# EAGLE board dookie_2 (EAGLE 5.06)
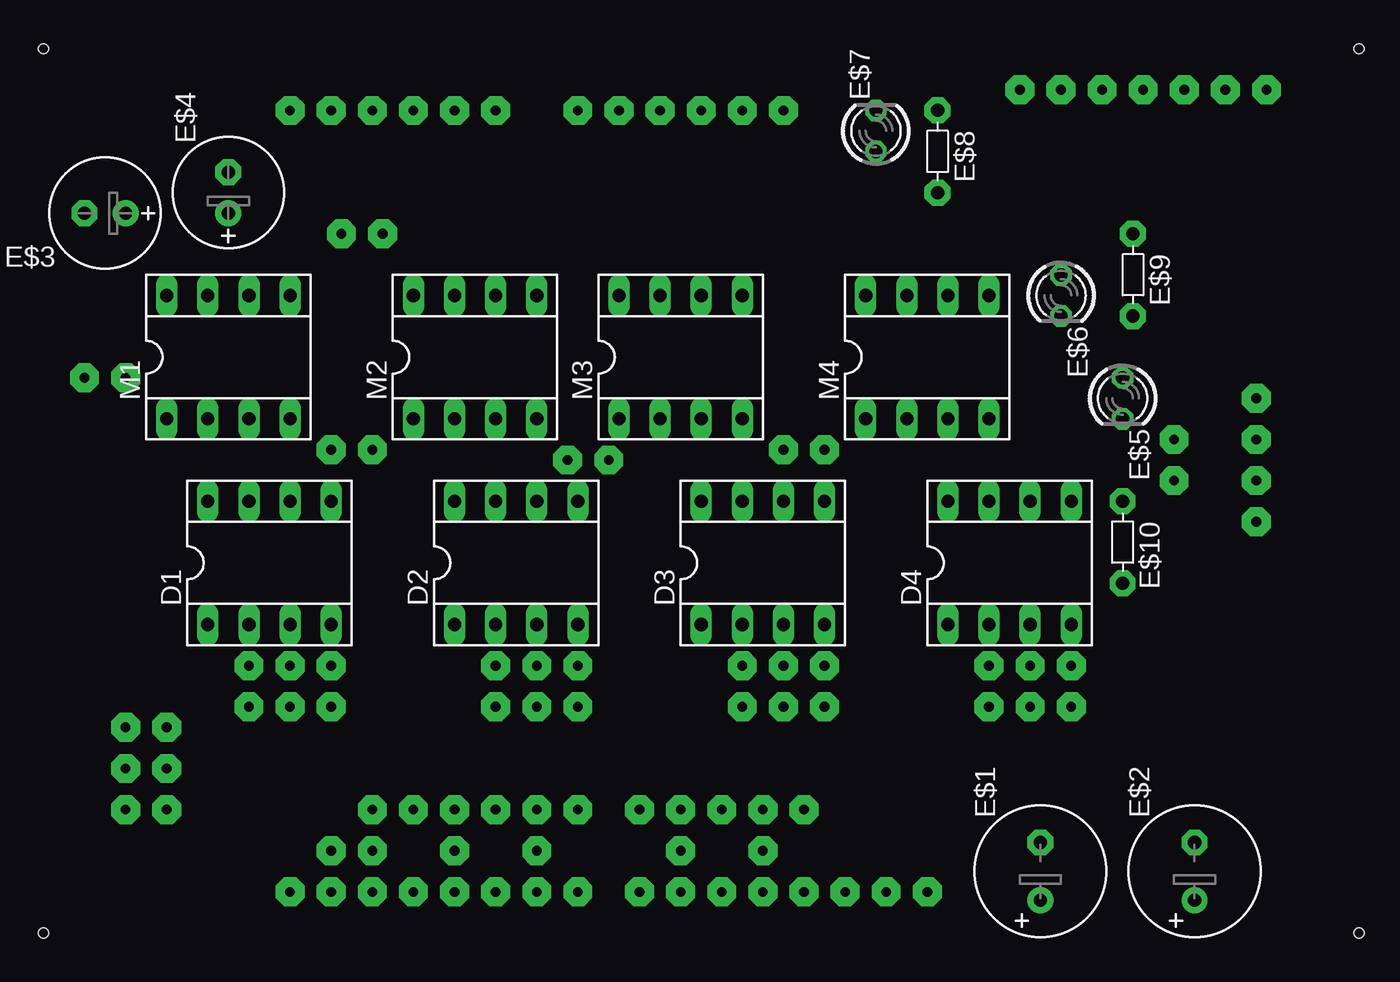
[diagram p0: board, top side]
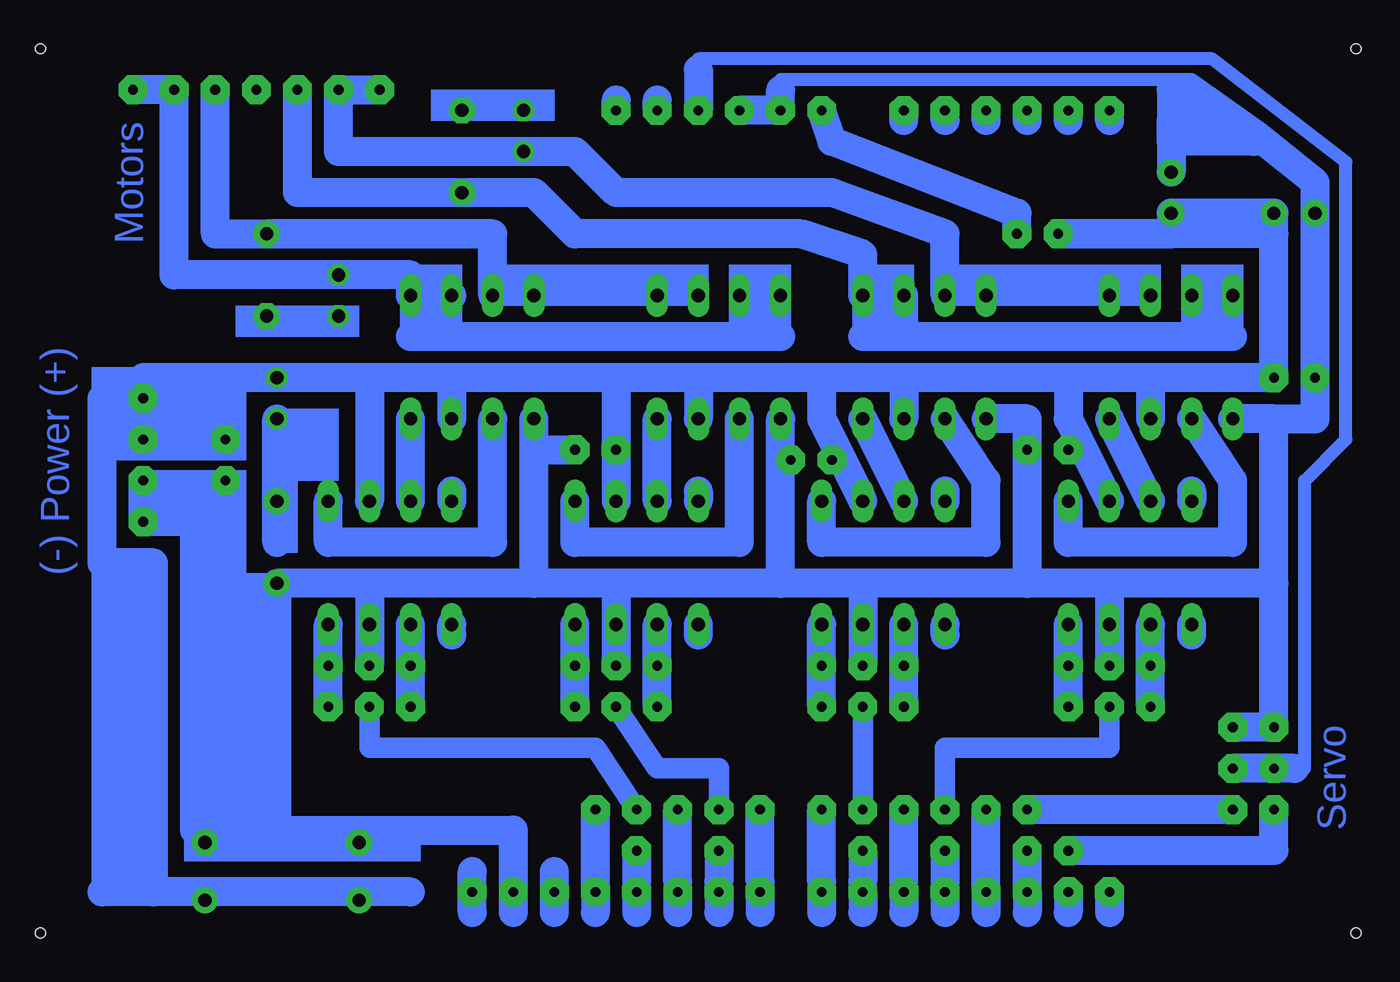
[diagram p1: board, bottom side, seen from below]

No outline drawn. Coordinates in mm, seen from the top.
Copper layers (1*16): Top 0.035mm / dielectric 1.5mm / Bottom 0.035mm
Design rules "default": minimum track width 10mil, minimum drill 24mil, track to track 8mil, track to pad 8mil, pad to pad 8mil, via to via 8mil, smd to smd 8mil, copper to edge 40mil, drill to drill 8mil, minimum pad ring 10mil, minimum via ring 8mil, stop-mask expansion 4mil, vias tented up to drill 0mil, thermal gap 10mil
Holes 0.6 mm at 0,0 0,54.61 81.28,54.61 81.28,0

## Footprints (pad centres in the part's own frame; a part is rotated, then mirrored left to right if it is on the bottom)
SOCKET-08 = drill 0.813 long: 1 -3.81,-3.81; 2 -1.27,-3.81; 3 1.27,-3.81; 4 3.81,-3.81; 5 3.81,3.81; 6 1.27,3.81; 7 -1.27,3.81; 8 -3.81,3.81
E3,5-8 = drill 0.813 pad 1.6 round: + -1.778,0 | drill 0.813 pad 1.6 octagon: - 1.778,0
E2,5-7 = drill 0.813 pad 1.6 round: + -1.27,0 | drill 0.813 pad 1.6 octagon: - 1.27,0
LED3MM = drill 0.813 octagon: A -1.27,0; K 1.27,0
R-5 = drill 0.813 pad 1.6 octagon: 1 -2.54,0; 2 2.54,0

## Placement (x,y rotation side)
D1  IXDF-404  [SOCKET-08]  13.97,22.86 0 top
D2  IXDF-404  [SOCKET-08]  29.21,22.86 0 top
D3  IXDF-404  [SOCKET-08]  44.45,22.86 0 top
D4  IXDF-404  [SOCKET-08]  59.69,22.86 0 top
E$1  [E3,5-8]  61.59,3.81 90 top
E$2  [E3,5-8]  71.12,3.81 90 top
E$3  [E2,5-7]  3.81,44.45 180 top
E$4  [E2,5-7]  11.43,45.72 90 top
E$5  [LED3MM]  66.67,33.02 270 top
E$6  [LED3MM]  62.87,39.37 270 top
E$7  [LED3MM]  51.44,49.53 90 top
E$8  [R-5]  55.24,48.26 270 top
E$9  [R-5]  67.31,40.64 270 top
E$10  [R-5]  66.67,24.13 270 top
M1  AOP-610  [SOCKET-08]  11.43,35.56 0 top
M2  AOP-610  [SOCKET-08]  26.67,35.56 0 top
M3  AOP-610  [SOCKET-08]  39.37,35.56 0 top
M4  AOP-610  [SOCKET-08]  54.61,35.56 0 top

## Library data of the parts
D1-D4 M1-M4 = ic-package
E$1-E$4 = rcl
E$5-E$7 = led
E$8-E$10 = discrete

## Nets
GND: E$4.-
VCC: E$3.+ E$4.+

## Tracks (layer width: path | path; a pad name or v marks a point on that pad's centre or on a via)
5V  (via drill 0.6 pad 1.78)
  Bottom 0.813: 3.81,10.16 3.17,10.16 3.17,27.94 0.64,30.48 0.64,47.62 8.89,53.98 40.64,53.98 40.64,53.34
  Bottom 1.778: 3.81,10.16 v7.62,10.16 | 40.64,53.34 v40.64,50.8
GND  (via drill 0.6 pad 1.78)
  Bottom 0.813: 2.54,46.35 2.54,46.99 5.71,49.53 10.16,52.7 35.56,52.7 v35.56,50.8
  Bottom 1.778: 66.67,6.35 71.75,6.35 71.75,25.4 v74.93,25.4 v74.93,27.94 | 66.67,6.35 52.07,6.35 v52.07,2.54 52.07,1.27 | 60.96,21.59 66.67,21.59 66.67,6.35 | 60.96,21.59 v60.96,16.51 | 50.8,21.59 60.96,21.59 | 50.8,21.59 50.8,29.84 | 50.8,29.84 50.8,31.75 | 45.72,21.59 50.8,21.59 | 45.72,21.59 v45.72,16.51 | 35.56,21.59 45.72,21.59 | 35.56,21.59 35.56,31.75 | 30.48,21.59 35.56,21.59 | 30.48,21.59 v30.48,16.51 | 20.32,21.59 30.48,21.59 | 20.32,21.59 20.32,31.75 22.86,31.75 | 15.24,21.59 20.32,21.59 | 15.24,21.59 v15.24,16.51 | 5.08,21.59 v5.08,12.7 v7.62,12.7 | v38.1,50.8 v35.56,50.8 35.56,52.07 | 5.08,21.59 5.08,31.75 | 5.08,21.59 15.24,21.59 | 5.08,31.75 3.81,31.75 | 5.08,31.75 2.54,31.75 v2.54,34.29 2.54,46.35 5.71,48.9 6.35,48.9 | 5.08,31.75 7.62,31.75 | 50.8,29.84 v48.26,29.84 | 11.43,48.9 E$4.- | 6.35,48.9 11.43,48.9 | 6.35,48.9 10.79,52.07 11.43,52.07 11.43,50.16 | 11.43,48.9 11.43,50.16 | 11.43,50.16 9.53,50.16
S$1  (via drill 0.6 pad 1.78)
  Bottom 0.813: 43.18,19.05 v43.18,16.51
  Bottom 1.778: v43.18,13.97 43.18,19.05
S$2  (via drill 0.6 pad 1.78)
  Bottom 1.778: v15.24,2.54 15.24,1.27
S$3  (via drill 0.6 pad 1.78)
  Bottom 1.27: v15.24,13.97 15.24,11.43 25.4,11.43 v25.4,7.62
S$4  (via drill 0.6 pad 1.78)
  Bottom 1.778: v39.37,5.08 39.37,3.17
S$5
  Bottom 1.778: 49.53,1.27 49.53,3.81
S$6  (via drill 0.6 pad 1.78)
  other vias: 48.26,16.51
S$7
  Bottom 1.778: 54.61,1.27 54.61,3.81
S$8  (via drill 0.6 pad 1.78)
  Bottom 1.778: v25.4,5.08 25.4,3.17
S$9  (via drill 0.6 pad 1.78)
  Bottom 1.27: 55.88,36.83 55.88,39.37
  Bottom 1.778: v75.56,52.07 v73.03,52.07 73.03,40.64 58.42,40.64 58.42,39.37 55.88,39.37
S$10  (via drill 0.6 pad 1.78)
  Bottom 1.778: v44.45,5.08 44.45,3.17
S$11
  Bottom 1.27: 38.1,36.83 38.1,39.37 35.56,39.37
S$12  (via drill 0.6 pad 1.78)
  Bottom 1.778: v17.78,2.54 17.78,1.27
S$13
  Bottom 1.778: 76.2,33.02 77.47,33.02 77.47,22.86 74.3,22.86 74.3,2.54
S$14  (via drill 0.6 pad 1.78)
  other vias: 45.72,29.84
S$15  (via drill 0.6 pad 1.78)
  Bottom 0.406: v17.78,13.97 v17.78,16.51
  Bottom 1.27: v17.78,13.97 v17.78,16.51
  Bottom 1.778: v17.78,13.97 17.78,19.05
S$16  (via drill 0.6 pad 1.78)
  other vias: 69.85,30.48
S$17
  Bottom 1.778: 58.42,2.54 77.47,2.54
S$18  (via drill 0.6 pad 1.78)
  Bottom 1.778: v5.08,7.62 5.08,5.08 v17.78,5.08
S$19  (via drill 0.6 pad 1.78)
  other vias: 5.08,10.16
S$20  (via drill 0.6 pad 1.78)
  Bottom 1.27: 40.64,39.37 53.34,39.37
  Bottom 1.778: v70.48,52.07 70.48,43.18 53.34,43.18 | 53.34,43.18 67.31,43.18 | 53.34,39.37 53.34,43.18
S$21  (via drill 0.6 pad 1.78)
  other vias: 67.94,52.07
S$22  (via drill 0.6 pad 1.78)
  other vias: 32.38,29.21
S$23
  Bottom 1.27: 10.16,36.83 10.16,39.37 7.62,39.37
S$24
  Bottom 1.778: 12.7,26.67 15.24,31.75
S$25  (via drill 0.6 pad 1.78)
  Bottom 1.778: v43.18,50.8 43.18,51.44
S$26  (via drill 0.6 pad 1.78)
  Bottom 1.778: v45.72,50.8 45.72,51.44
S$27
  Bottom 1.778: 7.62,36.83 30.48,36.83
S$28
  Bottom 1.778: 35.56,36.83 58.42,36.83
S$29  (via drill 0.6 pad 1.78)
  Bottom 1.778: 27.94,50.16 v27.94,50.8
S$30  (via drill 0.6 pad 1.78)
  Bottom 1.778: 27.94,3.17 v27.94,7.62
S$31  (via drill 0.6 pad 1.78)
  Bottom 1.778: 25.4,50.16 v25.4,50.8
S$32  (via drill 0.6 pad 1.78)
  Bottom 1.27: v45.72,13.97 43.18,10.16 39.37,10.16 v39.37,7.62
S$33  (via drill 0.6 pad 1.78)
  other vias: 34.92,29.21
S$34  (via drill 0.6 pad 1.78)
  Bottom 1.778: 22.86,50.16 v22.86,50.8
S$35  (via drill 0.6 pad 1.78)
  Bottom 1.778: v7.62,7.62 v20.32,7.62
S$36  (via drill 0.6 pad 1.78)
  Bottom 1.778: v30.48,5.08 30.48,3.17
S$37  (via drill 0.6 pad 1.78)
  Bottom 1.778: 20.32,50.16 v20.32,50.8
S$38
  Bottom 1.778: 66.67,24.13 66.67,31.75
S$39  (via drill 0.6 pad 1.78)
  Bottom 1.778: 17.78,50.16 v17.78,50.8
S$40  (via drill 0.6 pad 1.78)
  Bottom 1.778: 15.24,50.16 v15.24,50.8
S$41  (via drill 0.6 pad 1.78)
  Bottom 1.778: v20.32,5.08 v20.32,2.54 20.32,1.27
S$42  (via drill 0.6 pad 1.78)
  Bottom 1.778: v22.86,7.62 v22.86,2.54 22.86,1.27
S$43  (via drill 0.6 pad 1.78)
  Bottom 1.778: v25.4,2.54 25.4,1.27
S$44  (via drill 0.6 pad 1.78)
  Bottom 1.778: 25.4,39.37 25.4,43.18 32.38,45.72 45.72,45.72 48.26,48.26 62.87,48.26 v62.87,52.07 v60.33,52.07
S$45
  Bottom 1.778: 25.4,31.75 22.86,27.94 22.86,24.13 33.02,24.13 33.02,26.67
S$46  (via drill 0.6 pad 1.78)
  Bottom 1.778: v27.94,2.54 27.94,1.27
S$47  (via drill 0.6 pad 1.78)
  Bottom 1.778: v30.48,2.54 30.48,1.27
S$48  (via drill 0.6 pad 1.78)
  Bottom 1.778: v33.02,2.54 33.02,1.27
S$49  (via drill 0.6 pad 1.78)
  Bottom 1.27: 27.94,39.37 30.48,39.37
  Bottom 1.778: v65.41,52.07 65.41,45.72 50.8,45.72 48.26,43.18 34.29,43.18 30.48,41.91 30.48,39.37 | 27.94,36.83 27.94,39.37
S$51  (via drill 0.6 pad 1.78)
  other vias: 58.42,16.51
S$52  (via drill 0.6 pad 1.78)
  Bottom 1.778: v36.83,2.54 36.83,1.27
S$53  (via drill 0.6 pad 1.78)
  other vias: 17.78,29.84
S$54
  Bottom 1.778: 10.16,31.75 7.62,27.94 7.62,24.13 17.78,24.13 17.78,26.67
S$56  (via drill 0.6 pad 1.78)
  other vias: 63.5,16.51
S$57  (via drill 0.6 pad 1.78)
  Bottom 1.778: v39.37,2.54 39.37,1.27
S$58  (via drill 0.6 pad 1.78)
  other vias: 20.32,29.84
S$59  (via drill 0.6 pad 1.78)
  Bottom 0.61: v44.45,7.62 44.45,7.75
  Bottom 1.27: v60.96,13.97 60.96,11.43 46.99,11.43 v44.45,7.62
S$61  (via drill 0.6 pad 1.78)
  Bottom 1.778: v41.91,2.54 41.91,1.27
S$63  (via drill 0.6 pad 1.78)
  Bottom 1.778: v44.45,2.54 44.45,1.27
S$65  (via drill 0.6 pad 1.78)
  Bottom 1.27: v30.48,7.62 v30.48,13.97
S$66  (via drill 0.6 pad 1.78)
  Bottom 1.778: v46.99,7.62 v46.99,2.54 46.99,1.27
S$68  (via drill 0.6 pad 1.78)
  other vias: 49.53,2.54
S$70  (via drill 0.6 pad 1.78)
  other vias: 54.61,2.54
S$71  (via drill 0.6 pad 1.78)
  Bottom 1.778: 33.02,3.17 v33.02,7.62
S$74  (via drill 0.6 pad 1.78)
  other vias: 69.85,27.94
S$104
  Bottom 1.778: 38.1,31.75 38.1,24.13 48.26,24.13 48.26,26.67
S$108
  Bottom 1.778: 53.34,31.75 53.34,24.13 63.5,24.13 63.5,26.67
S$128
  Bottom 1.778: 10.16,27.3 10.16,26.67
S$138
  Bottom 1.778: 25.4,27.3 25.4,26.67
S$139
  Bottom 1.778: 27.94,26.67 30.48,31.75
S$142
  Bottom 1.778: 10.16,18.41 10.16,19.05
S$143  (via drill 0.6 pad 1.78)
  Bottom 0.813: v12.7,13.97 v12.7,16.51
  Bottom 1.778: v12.7,13.97 12.7,19.05
S$146
  Bottom 1.778: 25.4,18.41 25.4,19.05
S$147  (via drill 0.6 pad 1.78)
  Bottom 0.406: v27.94,13.97 v27.94,16.51
  Bottom 0.813: v27.94,16.51 27.94,19.05
  Bottom 1.27: v27.94,13.97 v27.94,16.51
  Bottom 1.778: v27.94,13.97 27.94,19.05
S$149  (via drill 0.6 pad 1.78)
  Bottom 0.406: v33.02,13.97 v33.02,16.51
  Bottom 1.27: v33.02,13.97 v33.02,16.51
  Bottom 1.778: v33.02,13.97 33.02,19.05
S$150
  Bottom 1.778: 40.64,27.3 40.64,26.67
S$151
  Bottom 1.778: 43.18,26.67 43.18,31.75
S$154
  Bottom 1.778: 55.88,27.3 55.88,26.67
S$155
  Bottom 1.778: 58.42,26.67 58.42,31.75
S$158
  Bottom 1.778: 40.64,18.41 40.64,19.05
S$159  (via drill 0.6 pad 1.78)
  Bottom 1.778: 41.91,3.17 v41.91,7.62
S$161  (via drill 0.6 pad 1.78)
  Bottom 1.778: 36.83,3.17 v36.83,7.62
S$163  (via drill 0.6 pad 1.78)
  Bottom 1.778: v48.26,13.97 48.26,19.05
S$164
  Bottom 1.778: 55.88,18.41 55.88,19.05
S$165  (via drill 0.6 pad 1.78)
  Bottom 1.778: v58.42,13.97 58.42,19.05
S$167  (via drill 0.6 pad 1.78)
  Bottom 1.778: v63.5,13.97 63.5,19.05
VCC  (via drill 0.6 pad 1.78)
  Bottom 1.778: v74.93,33.02 v74.93,30.48 70.48,30.48 | v74.93,33.02 74.93,34.29 60.96,34.29 | 60.96,34.29 60.96,26.67 | 55.88,34.29 60.96,34.29 | 55.88,34.29 55.88,31.75 | 45.72,34.29 55.88,34.29 | 45.72,34.29 45.72,26.67 | 30.48,26.67 33.02,31.75 33.02,34.29 | 40.64,34.29 45.72,34.29 | 40.64,34.29 40.64,31.75 | 33.02,34.29 40.64,34.29 | 15.24,26.67 17.78,31.75 17.78,34.29 | 27.94,34.29 33.02,34.29 | 27.94,34.29 27.94,31.75 | 17.78,34.29 27.94,34.29 | 12.7,34.29 17.78,34.29 | 12.7,34.29 12.7,31.75 | v5.08,34.29 5.08,43.18 v18.41,43.18 11.43,43.18 E$4.+ E$3.+ v5.08,34.29 | v5.08,34.29 12.7,34.29 | v74.93,33.02 75.56,33.02
VIN  (via drill 0.6 pad 1.78)
  Bottom 1.778: v33.02,50.8 32.38,48.9 20.95,44.45 v20.95,43.18
(copper drawn outside any net)
  shapes: Bottom area x26

## Text on the board
Bottom: Motors | (-) Power (+) | Servo